# Altium PCB EPS.PcbDoc
Units mm, origin at the board's own origin, x right, y up, seen from the top; angles counter-clockwise.
Board outline 80 x 80 mm, 4 copper layers (Top Layer, Int1 (GND), Int2 (PWR), Bottom Layer), stack 1.57 mm thick; 34 components, 14 nets, 95 pads, 23 vias.
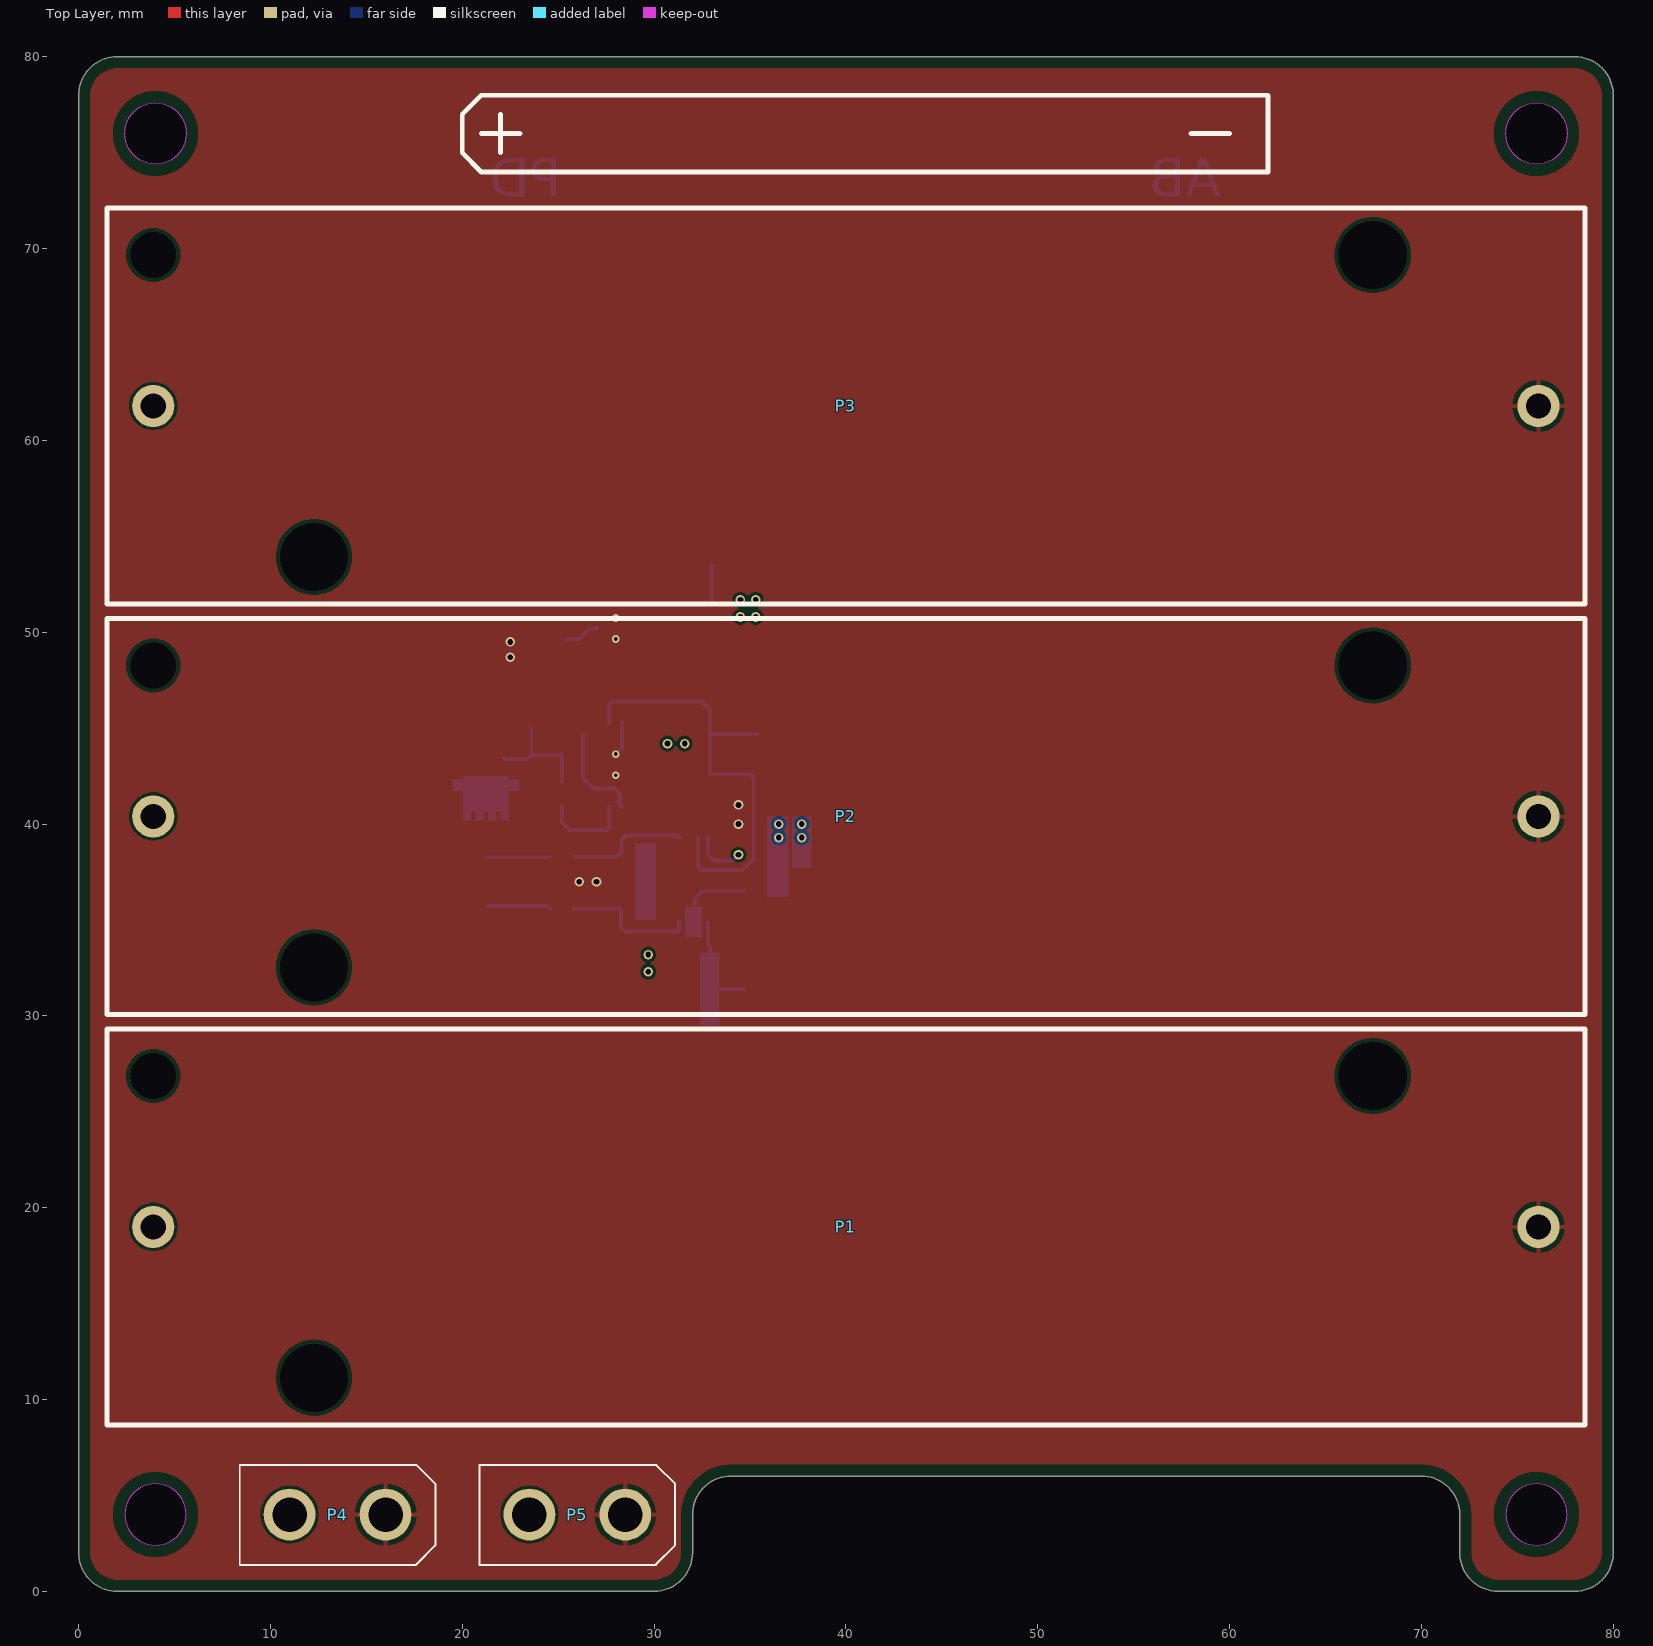
[diagram p0: Top Layer view]
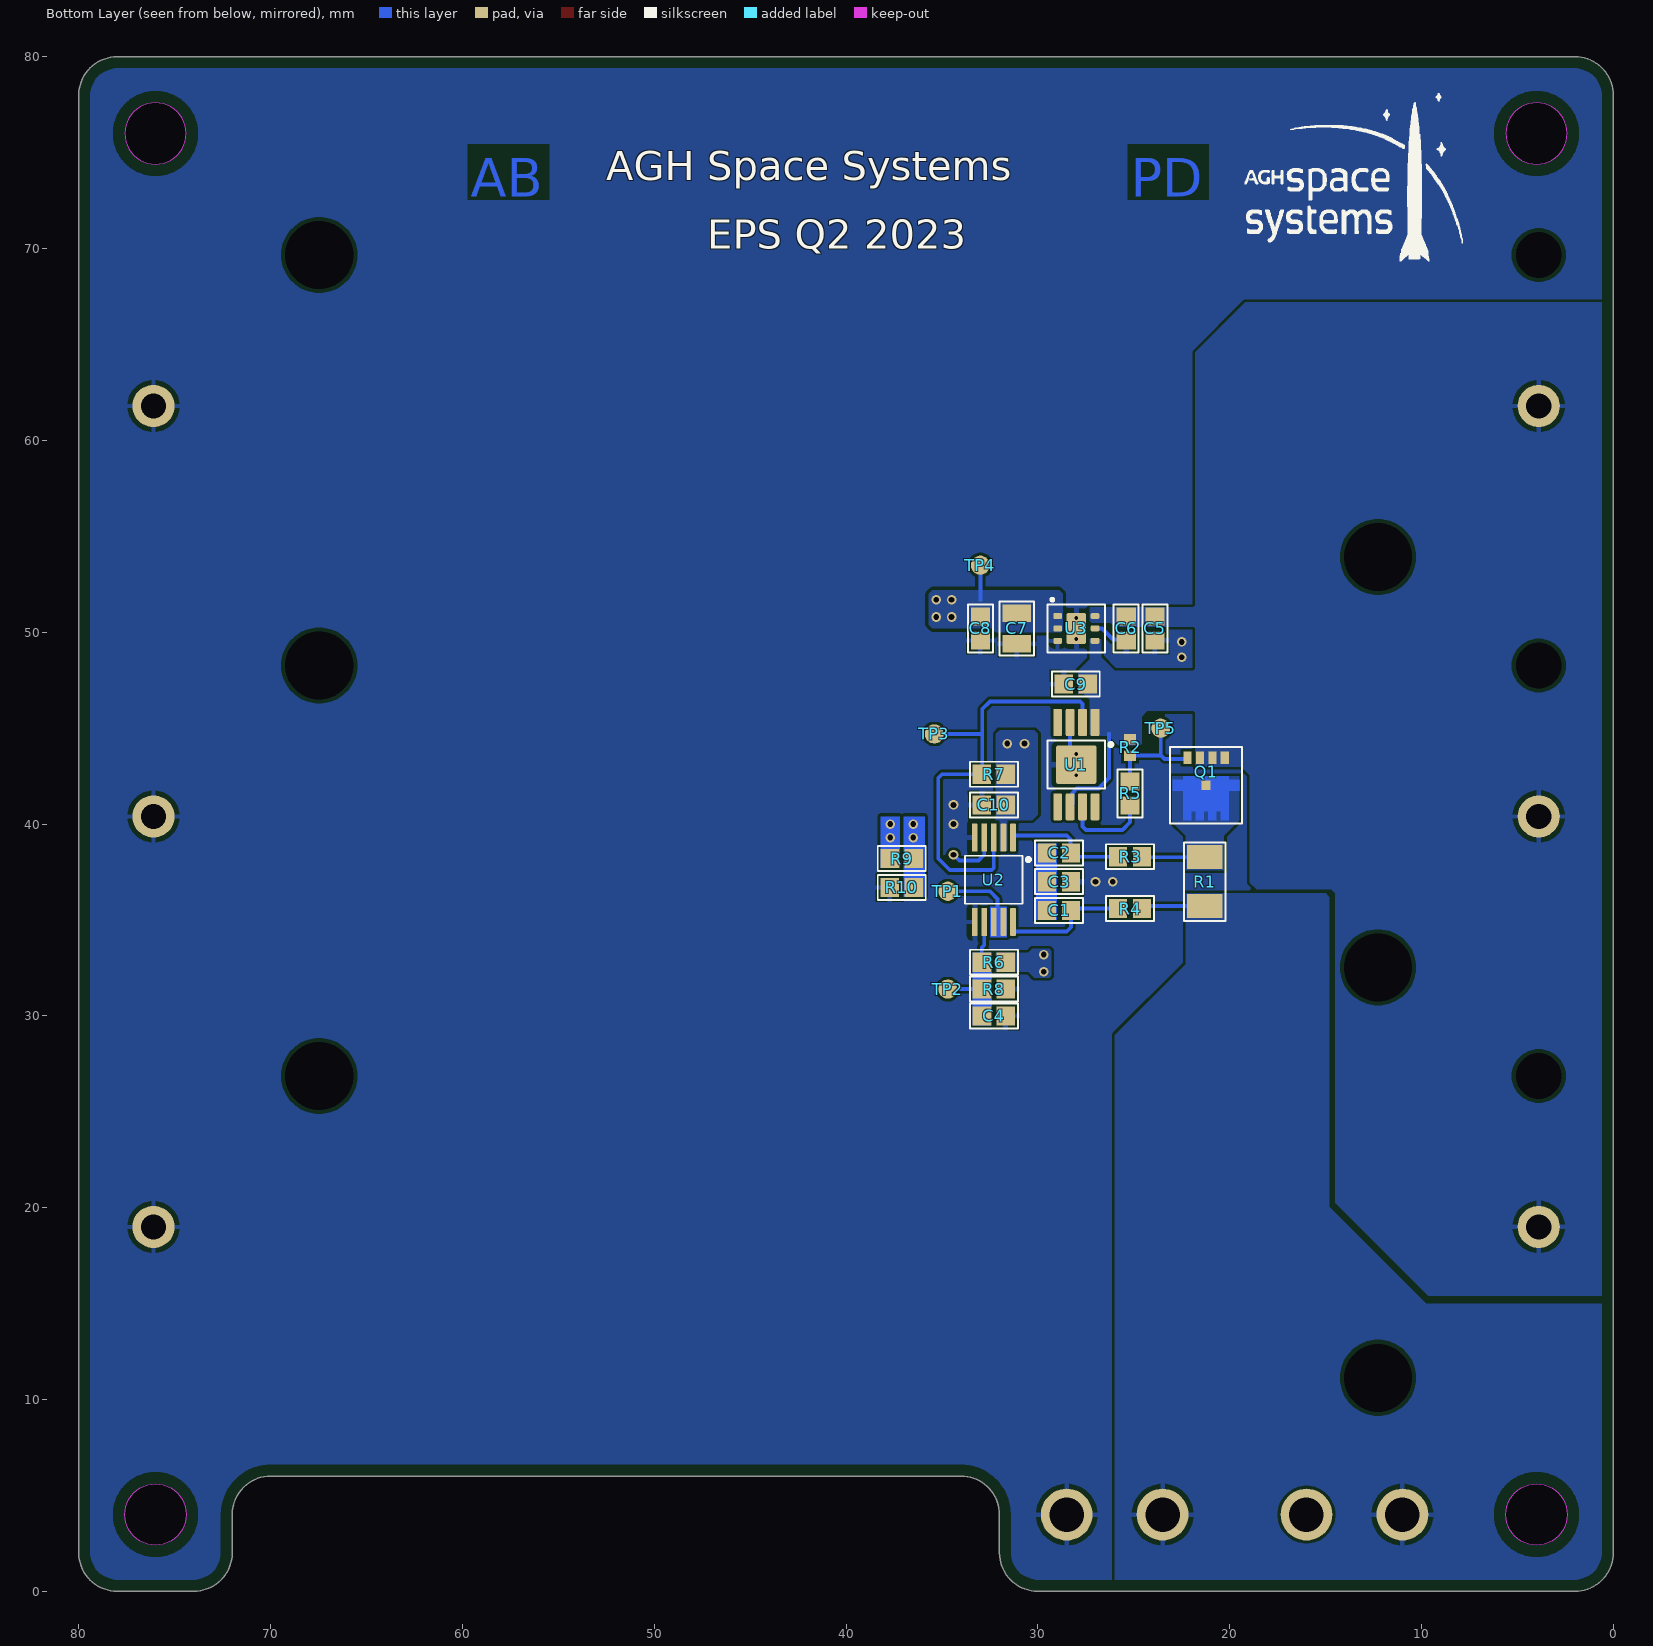
[diagram p1: Bottom Layer view, seen from below]
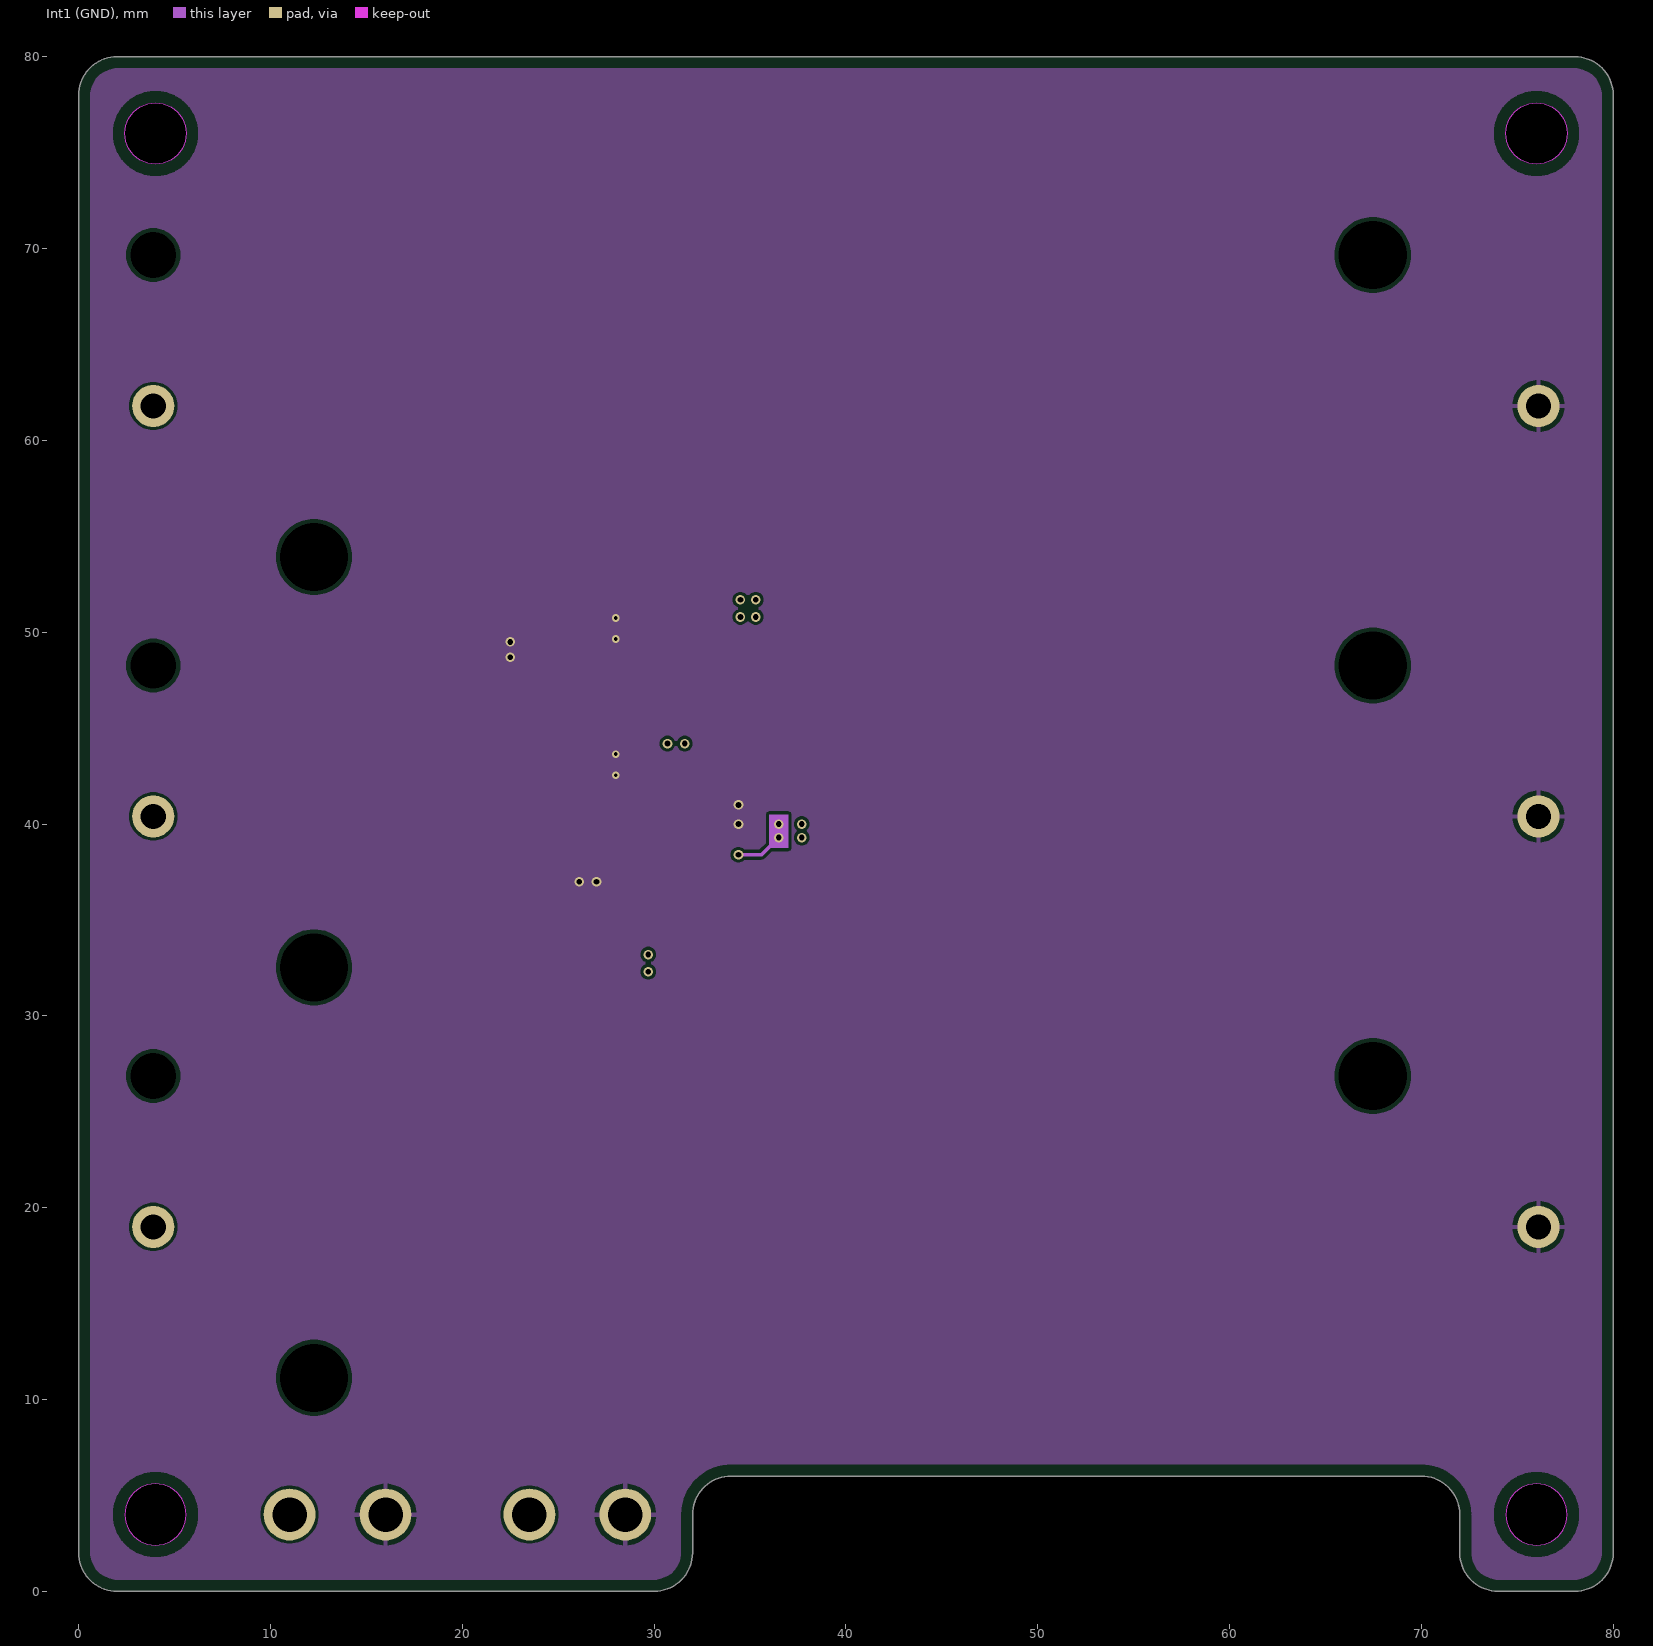
[diagram p2: Int1 (GND)]
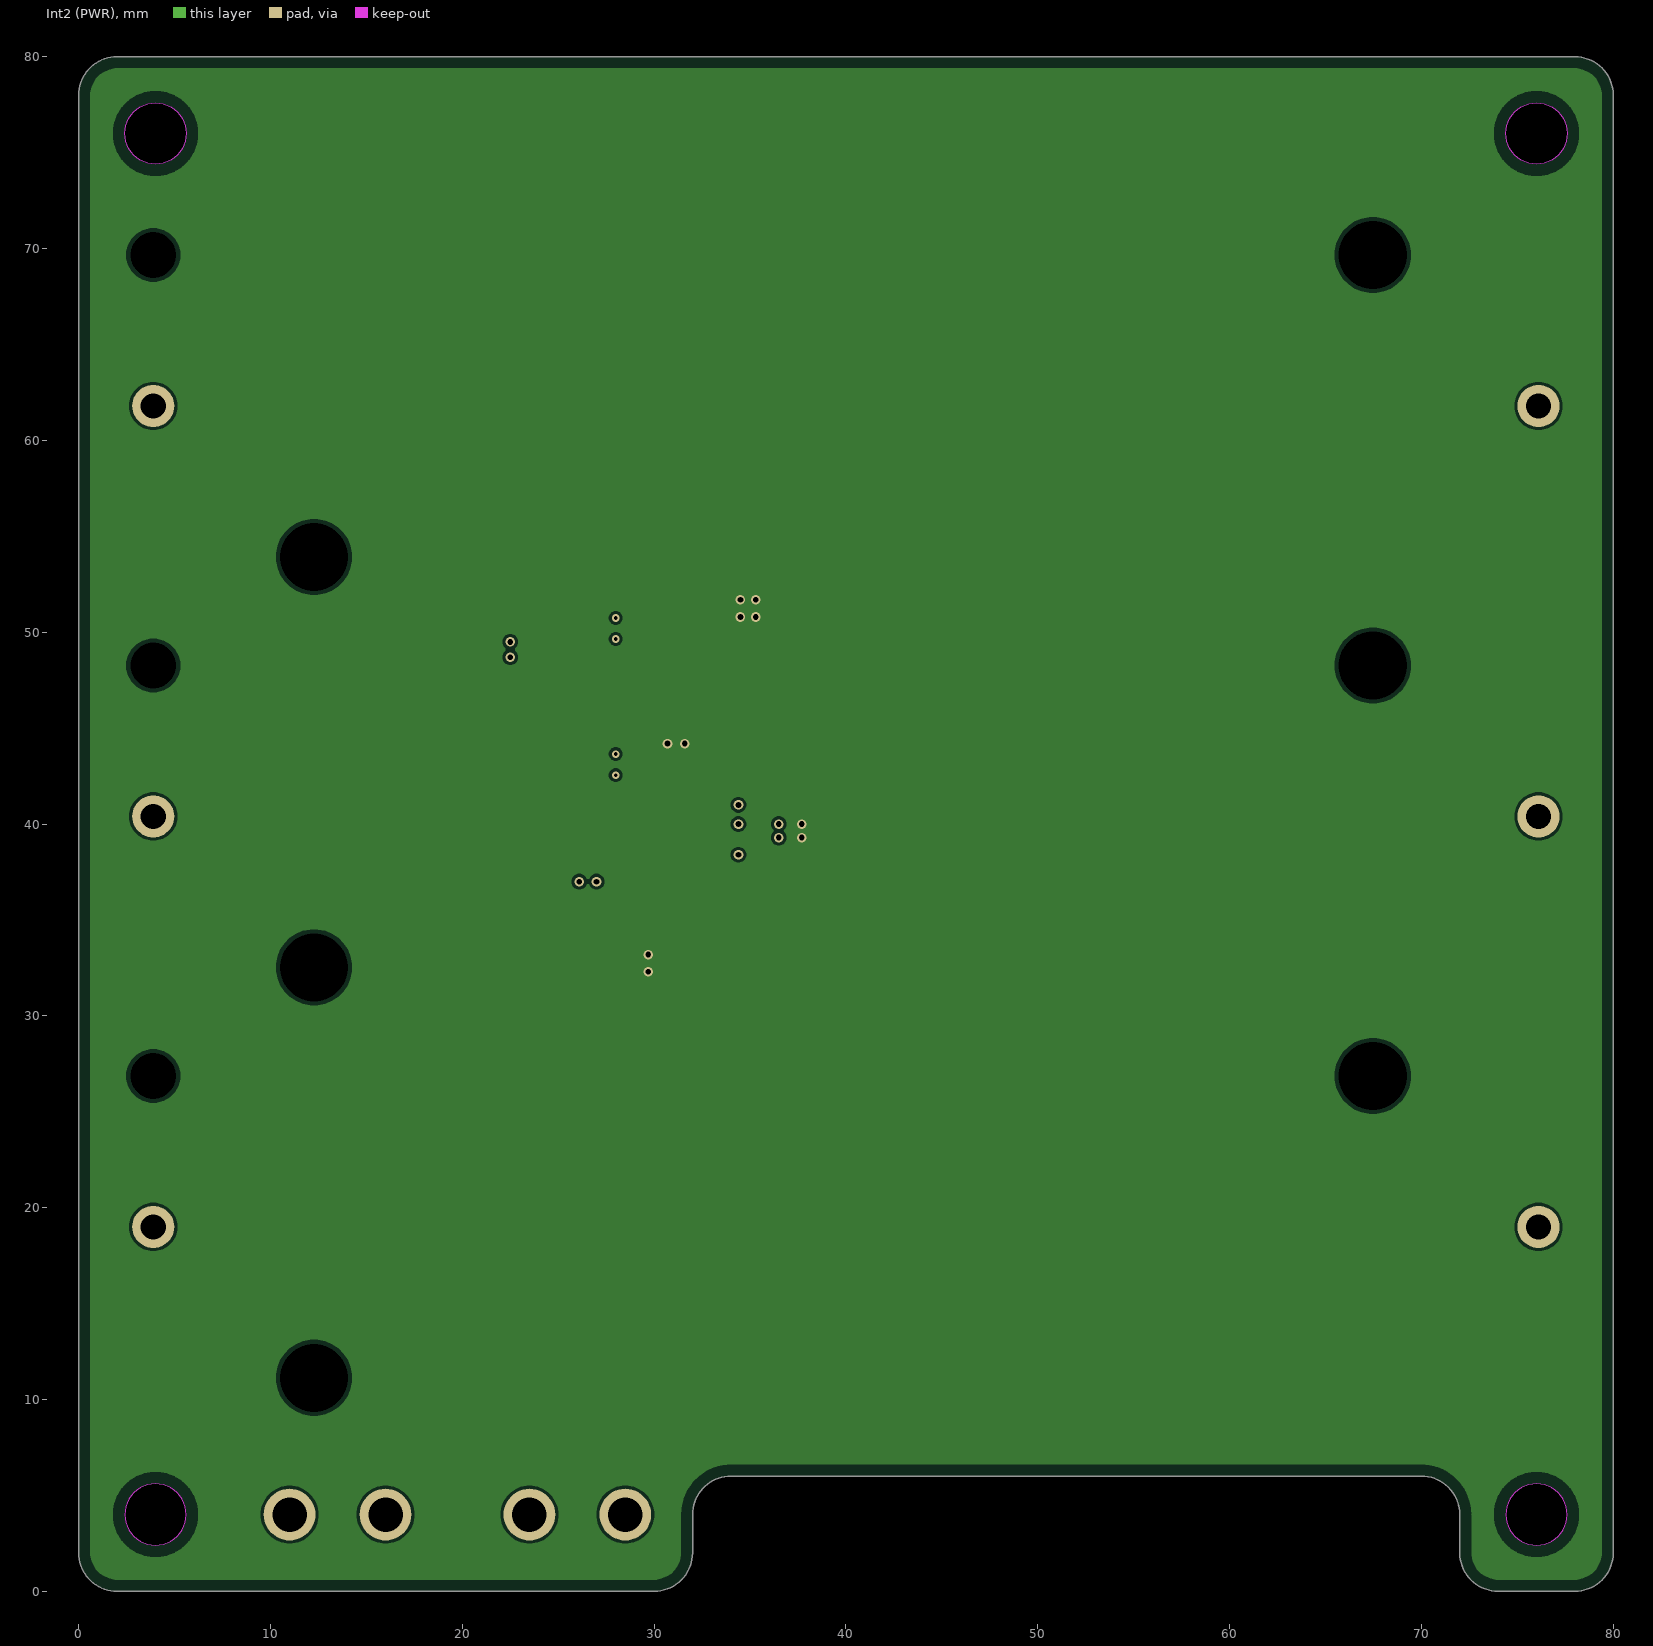
[diagram p3: Int2 (PWR)]
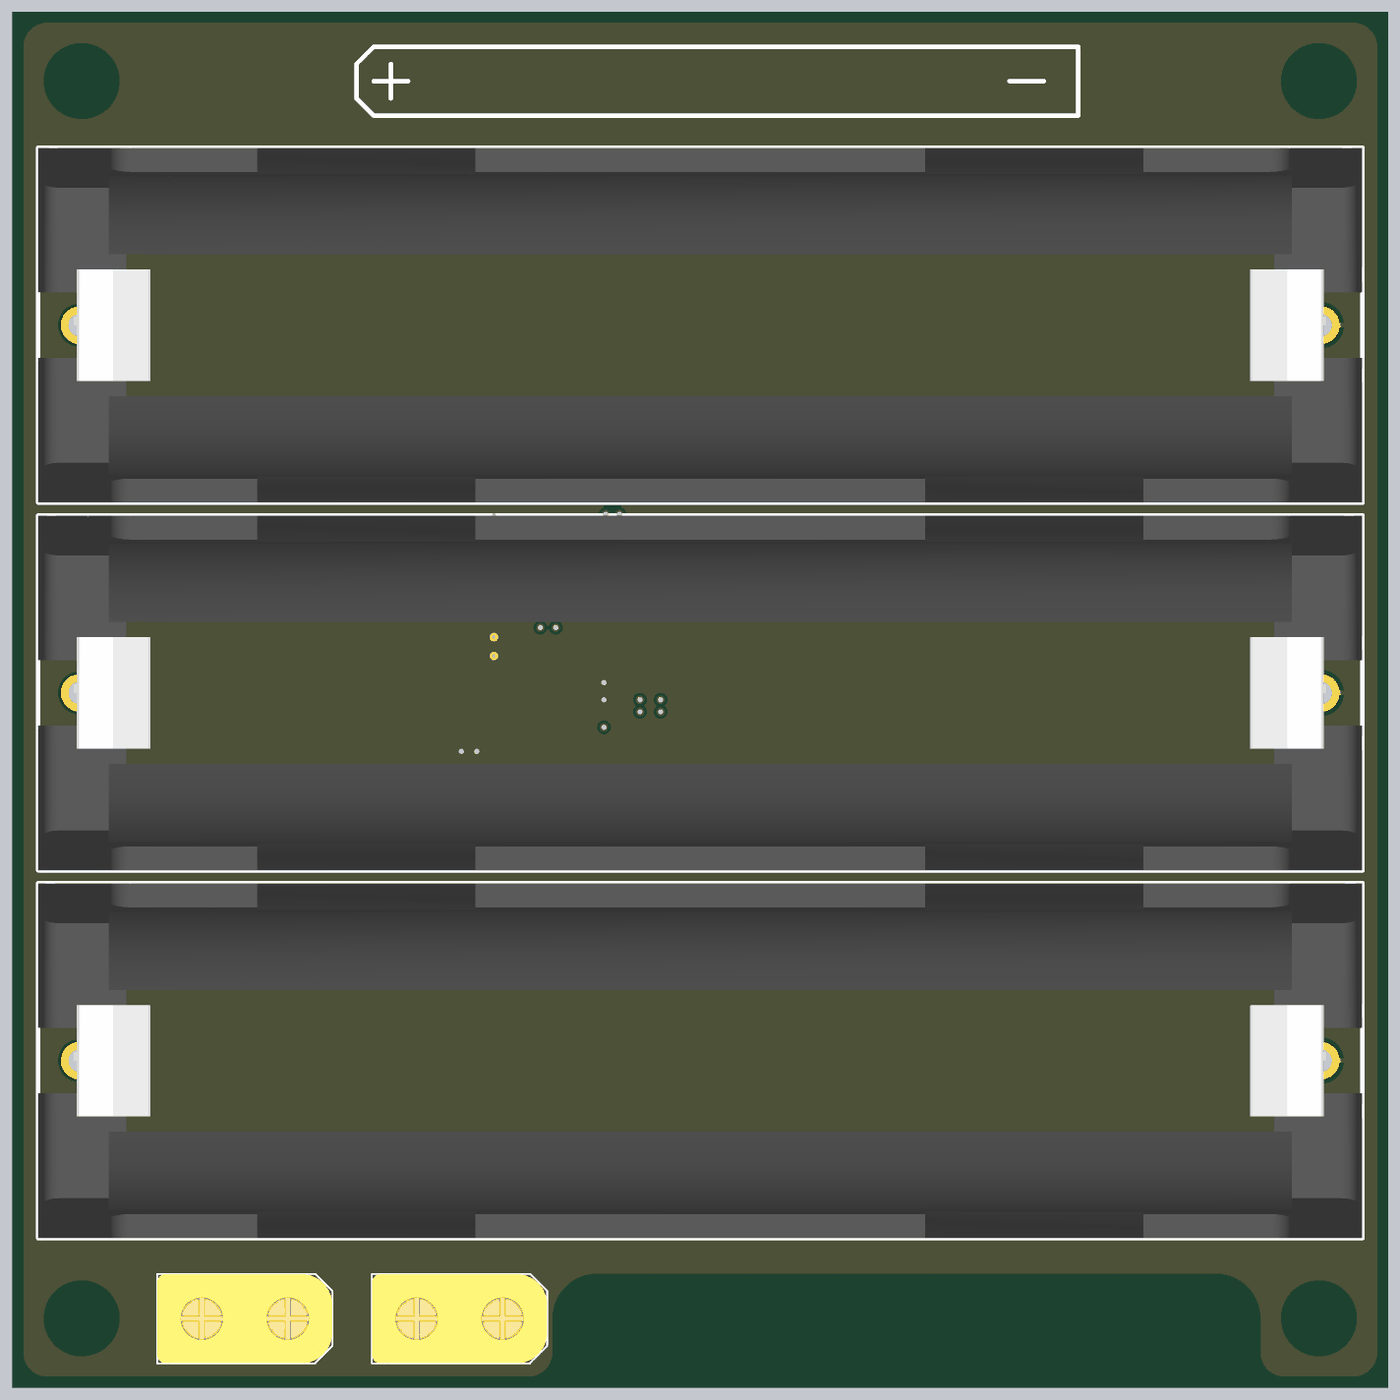
[diagram p4: 3D render of the assembled board from above, using the file's embedded part models]
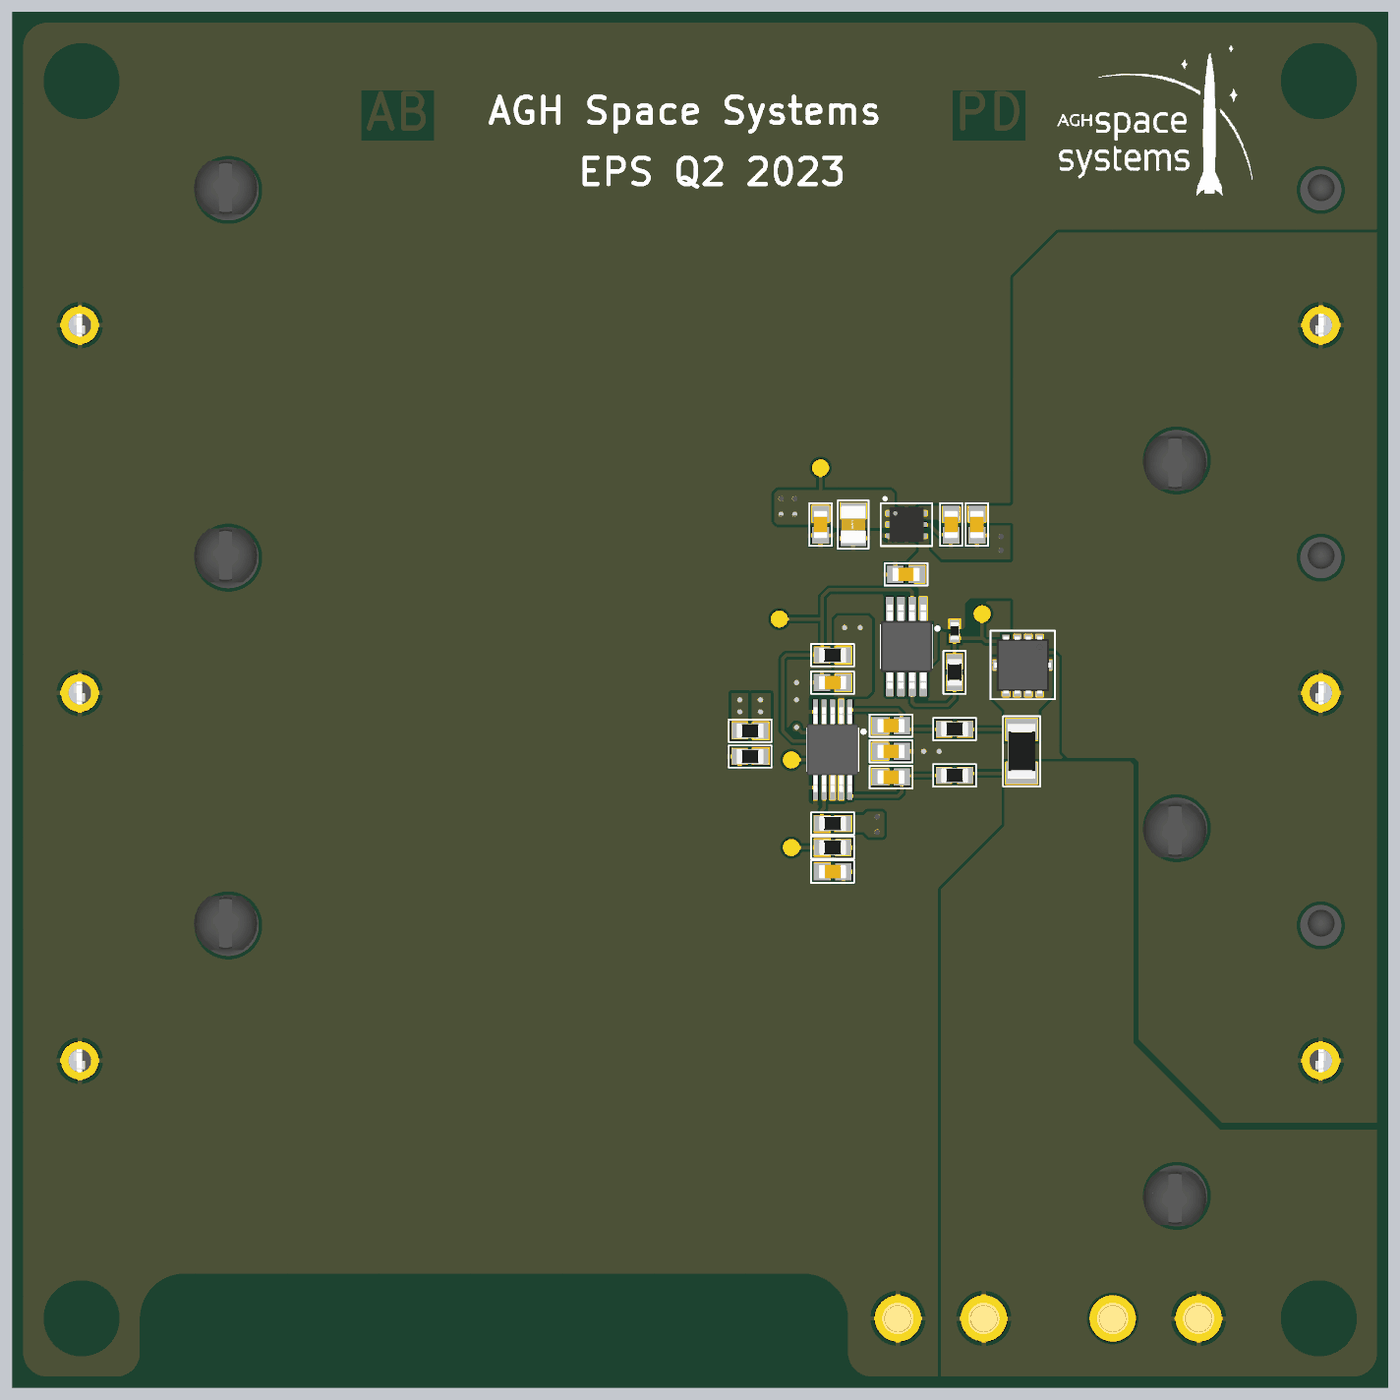
[diagram p5: 3D render of the assembled board from below, using the file's embedded part models]

## Layer stack, top to bottom
Top Solder: solder mask 0.0254, SM-001, Dk 4
Top Layer: signal copper 0.035
Dielectric 2: prepreg 0.2, PP-017, Dk 4.6
Int1 (GND): signal copper 0.0175
Dielectric 3: core 1.065, Core-039, Dk 4.8
Int2 (PWR): signal copper 0.0175
Dielectric 4: prepreg 0.2, PP-017, Dk 4.6
Bottom Layer: signal copper 0.035
Bottom Solder: solder mask 0.0254, SM-001, Dk 4

## Board outline
0.006,2.006 ccw(c2.006,2.006) 2.006,0.006 30,0.006 30.006,0.006 ccw(c30.006,2.006) 32.006,2.006 32.006,4.006 cw(c34.006,4.006) 34.006,6.006 34,6.006 70.006,6.006 cw(c70.006,4.006) 72.006,4.006 72.006,2.006 ccw(c74.006,2.006) 74.006,0.006 78.006,0.006 ccw(c78.006,2.006) 80.006,2.006 80.006,78.006 ccw(c78.006,78.006) 78.006,80.006 2.006,80.006 ccw(c2.006,78.006) 0.006,78.006
cut-out: 76.006,74.406 cw(c76.006,76.006) 74.406,76.006 cw(c76.006,76.006) 76.006,77.606 cw(c76.006,76.006) 77.606,76.006 cw(c76.006,76.006)
cut-out: 4.006,74.406 cw(c4.006,76.006) 2.406,76.006 cw(c4.006,76.006) 4.006,77.606 cw(c4.006,76.006) 5.606,76.006 cw(c4.006,76.006)
cut-out: 2.406,4.006 ccw(c4.006,4.006) 4.006,2.406 ccw(c4.006,4.006) 5.606,4.006 ccw(c4.006,4.006) 4.006,5.606 ccw(c4.006,4.006)
cut-out: 74.406,4.006 ccw(c76.006,4.006) 76.006,2.406 ccw(c76.006,4.006) 77.606,4.006 ccw(c76.006,4.006) 76.006,5.606 ccw(c76.006,4.006)

## Design rules (kind name [scope] priority, off if disabled: settings)
AssemblyTestPointUsage [All] p1 off:
AssemblyTestpoint [All] p1 off: testpointundercomponent=TRUE minsize=1.016 maxsize=2.54 preferedsize=1.524 minholesize=0 maxholesize=1.016 preferedholesize=0.813 testpointgrid=0.025 usegrid=TRUE gridtolerance=0 allowsidetop=TRUE allowsidebottom=TRUE
BoardOutlineClearance BoardOutlineClearance_silk [OnLayer('Top Overlay') or OnLayer('Bottom Overlay')] p1: gap=0 ignorepadtopadclearanceinfootprint=FALSE
BoardOutlineClearance [All] p2: gap=0.6 ignorepadtopadclearanceinfootprint=FALSE
Clearance Clearance_HDI_BGA [TouchesRoom('BGA')] p1: gap=0.1 ignorepadtopadclearanceinfootprint=TRUE
Clearance Clearance_HDI [InNetClass('HDI') vs InNetClass('HDI')] p2: gap=0.15 ignorepadtopadclearanceinfootprint=TRUE except(0.2: Arc-Hole Track-Hole SMDPad-Hole THPad-Hole Via-Hole Fill-Hole Poly-Hole Region-Hole Text-Hole)
Clearance Clearance_HV [InNetClass('HV')] p3: gap=0.4 ignorepadtopadclearanceinfootprint=FALSE
Clearance Clearance_Internal [not (OnLayer('Top Shield') or OnLayer('Bottom Shield'))] p4: gap=0.15 ignorepadtopadclearanceinfootprint=TRUE except(0.2: Arc-Hole Track-Hole SMDPad-Hole THPad-Hole Via-Hole Fill-Hole Poly-Hole Region-Hole Text-Hole)
Clearance [All] p5: gap=0.25 ignorepadtopadclearanceinfootprint=TRUE
ComponentClearance [(CompPinCount > 1) vs (CompPinCount > 1)] p1: gap=0.5 collisioncheckmode=3 verticalgap=0.5 showdistances=FALSE
ComponentOrientations [All] p1: allowedrotations=27
FabricationTestPointUsage [All] p1 off: valid=0 allowmultiple=FALSE
FabricationTestpoint [All] p1 off: side=3 testpointundercomponent=TRUE minsize=1.016 maxsize=2.54 preferedsize=1.524 minholesize=0 maxholesize=1.016 preferedholesize=0.813 testpointgrid=0.025 allowsidetop=TRUE allowsidebottom=TRUE usegrid=TRUE gridtolerance=0
Height [All] p1: minheight=0 maxheight=50 prefheight=10
HoleSize [All] p1: absolutevalues=TRUE maxlimit=5.2 minlimit=0.2 maxpercent=80.000 minpercent=20.000
HoleToHoleClearance [All] p1: gap=0.3 allowstackedmicrovias=FALSE
MinimumAnnularRing MinimumAnnularRing_PTH [IsThruPin] p1: minimumring=0.1
MinimumAnnularRing MinimumAnnularRing_HDI [InNetClass('HDI') or TouchesRoom('BGA')] p2: minimumring=0.1
MinimumAnnularRing [All] p3: minimumring=0.1
MinimumSolderMaskSliver [All] p1: minsoldermaskwidth=0.09
PlaneClearance [All] p1: clearance=0.5
PlaneConnect [All] p1: pad.planeconnectstyle=Relief pad.reliefexpansion=0.5 pad.reliefentries=4 pad.reliefconductorwidth=0.25 pad.reliefairgap=0.25 via.planeconnectstyle=Direct via.reliefexpansion=0.508 via.reliefentries=4 via.reliefconductorwidth=0.254 via.reliefairgap=0.254
PolygonConnect PolygonConnect_GND [InNet('GND')] p1: thpad.connectstyle=Relief thpad.reliefconductorwidth=0.25 thpad.reliefentries=4 thpad.polygonreliefangle="90 Angle" thpad.airgapwidth=0.25 smdpad.connectstyle=Relief smdpad.reliefconductorwidth=0.25 smdpad.reliefentries=4 smdpad.polygonreliefangle="90 Angle" smdpad.airgapwidth=0.25 via.connectstyle=Direct via.reliefconductorwidth=0.254 via.reliefentries=4 via.polygonreliefangle="90 Angle" via.airgapwidth=0.254
PolygonConnect PolygonConnect_1 [All] p2: thpad.connectstyle=Relief thpad.reliefconductorwidth=0.254 thpad.reliefentries=4 thpad.polygonreliefangle="90 Angle" thpad.airgapwidth=0.254 smdpad.connectstyle=Direct smdpad.reliefconductorwidth=0.254 smdpad.reliefentries=4 smdpad.polygonreliefangle="90 Angle" smdpad.airgapwidth=0.254 via.connectstyle=Direct via.reliefconductorwidth=0.254 via.reliefentries=4 via.polygonreliefangle="90 Angle" via.airgapwidth=0.254
RoomDefinition EPS [InComponentClass('EPS')] p1: confinementstyle=ConfineOut formatcopy=TRUE lockcomponents=FALSE outline 99.45,58 112.25,58 112.25,70.1 99.45,70.1
RoutingVias [All] p1: holewidth=0.4 width=0.8 viastyle="Through Hole" minholewidth=0.2 minwidth=0.4 maxholewidth=0.5 maxwidth=1
SilkToSilkClearance [All] p1: silktosilkclearance=0
SilkToSolderMaskClearance [IsPad] p1: minsilkscreentomaskgap=0.1 clearancetoexposedcopper=TRUE
SolderMaskExpansion [All] p1: expansion=0.05 istentingtop=FALSE
UnRoutedNet [All] p1: checkbadconnections=TRUE
Width Width_FinePitch_BGA [(InNetClass('FinePitch') or InNetClass('HDI')) and  TouchesRoom('BGA')] p1: maxlimit=2 minlimit=0.1 preferedwidth=0.1
Width Width_FinePitch [InNetClass('FinePitch') or InNetClass('HDI')] p2: maxlimit=2 minlimit=0.15 preferedwidth=0.15
Width [All] p3: maxlimit=2 minlimit=0.2 preferedwidth=0.2
16 further rules are at their usual default settings.

## Components (designator, comment, footprint, x,y, rotation, side; value= is the part's Value field where it differs from the comment)
C1 "C" C_0603 28.9,35.5 r180 bottom value=100nF
C2 "C" C_0603 28.9,38.5 r0 bottom value=100nF
C3 "C" C_0603 28.9,37 r180 bottom value=10nF
C4 "C" C_0603 32.3,30 r180 bottom value=100nF
C5 "C" C_0603 23.9,50.2 r270 bottom value=1uF
C6 "C" C_0603 25.4,50.2 r270 bottom value=100nF
C7 "C" C_0805 31.1,50.2 r270 bottom value=2.2uF
C8 "C" C_0603 33,50.2 r270 bottom value=100nF
C9 "C" C_0603 28.025,47.3 r0 bottom value=100nF
C10 "C" C_0603 32.3,41 r0 bottom value=100nF
P1 "P_BATT" B_1043 40,19 r180 top locked value=1043
P2 "P_BATT" B_1043 40,40.4 r180 top locked value=1043
P3 "P_BATT" B_1043 40,61.8 r180 top locked value=1043
P4 "P_Header_2" XT30 13.5,4 r90 top value=XT30
P5 "P_Header_2" XT30 26,4 r90 top value=XT30
Q1 "Q_PMOSFET" WDFN_8 21.235,42.025 r180 bottom value=PXP6R1-30QLJ
R1 "R" R_1206 21.3,37 r270 bottom value=1mR
R2 "R" R_0402 25.2,44 r270 bottom value=47k
R3 "R" R_0603 25.2,38.3 r0 bottom value=10R
R4 "R" R_0603 25.2,35.6 r0 bottom value=10R
R5 "R" R_0603 25.2,41.6 r90 bottom value=10R
R6 "R" R_0603 32.3,32.8 r0 bottom value=5k
R7 "R" R_0603 32.3,42.6 r0 bottom value=10k
R8 "R" R_0603 32.3,31.4 r180 bottom value=10k
R9 "R" R_0603 37.1,38.2 r180 bottom value=10k
R10 "R" R_0603 37.1,36.7 r0 bottom value=0R
TP1 "TP_TestPoint" TP_01#1 34.7,36.8 r90 bottom value=TP
TP2 "TP_TestPoint" TP_01#2 34.7,31.4 r90 bottom value=TP
TP3 "TP_TestPoint" TP_01#2 35.4,44.7 r90 bottom value=TP
TP4 "TP_TestPoint" TP_01#2 33,53.5 r90 bottom value=TP
TP5 "TP_TestPoint" TP_01#2 23.6,45 r90 bottom value=TP
U1 "IC_UCC27423_Q1" MSOP_8 28,43.1 r0 bottom value=UCC27423QDGNRQ1
U2 "IC_INA381_Q1" VSSOP_10 32.3,37.1 r0 bottom value=INA381A3QDGSRQ1
U3 "IC_TLV76733DRVR" WSON_6 28,50.2 r180 bottom value=TLV76733DRVR

## Footprints (in the part's own frame and the unit in brackets; to place one, negate y for a bottom-side part, rotate by r counter-clockwise, add the part's x,y. Pads: shape width x height; smd on the part's side, far side on the other; paste and mask are expansions set on the pad)
B_1043 [mm]
  round 2.2 hole 1.32: 1(36.11,0) 2(-36.11,0)
  round 0 hole 3.55 unplated mask+0.102: ""(-27.47,-7.87)
  round 0 hole 3.55 unplated: ""(27.73,7.87)
  round 0 hole 2.39 unplated mask+0.102: ""(36.11,-7.87)
  silkscreen extent -38.54,-10.33 38.52,10.33, body extent -38.53,-10.32 38.53,10.33, height 15.16
C_0603 [mm]
  rect 0.95x1 smd: 1(-0.625,0) 2(0.625,0)
  silkscreen extent -1.25,-0.65 1.25,0.65, body extent -0.8,-0.4 0.8,0.4, height 0.8
C_0805 [mm]
  rect 0.9x1.5 smd: 1(-0.8,0) 2(0.8,0)
  silkscreen extent -1.4,-0.9 1.4,0.9, body extent -1.1,-0.73 1.1,0.72, height 0.88
MSOP_8 [mm]
  rrect22% 0.45x1.4 smd mask+0.05: 1(-0.975,-2.2) 2(-0.325,-2.2) 3(0.325,-2.2) 4(0.975,-2.2) 5(0.975,2.2) 6(0.325,2.2) 7(-0.325,2.2) 8(-0.975,2.2)
  rrect10% 2.1x2 smd paste-0.05 mask-0.05: 9(0,0)
  silkscreen extent -1.86,-1.25 1.5,1.25, body extent -1.5,-2.45 1.5,2.45, height 1.1
R_0402 [mm]
  rect 0.55x0.65 smd paste-0.04: 1(-0.425,0) 2(0.425,0)
  body extent -0.5,-0.25 0.5,0.25, height 0.35
R_0603 [mm]
  rect 0.95x1 smd paste-0.038: 1(-0.625,0) 2(0.625,0)
  silkscreen extent -1.25,-0.65 1.25,0.65, body extent -0.77,-0.42 0.78,0.43, height 0.46
R_1206 [mm]
  rect 1.25x1.85 smd: 1(-1.275,0) 2(1.275,0)
  silkscreen extent -2.05,-1.07 2.05,1.07, body extent -1.6,-0.8 1.6,0.8, height 0.56
TP_01#1 [mm]
  round 1 smd paste-0.6: 1(-0.3,0)
TP_01#2 [mm]
  round 1 smd paste-0.6: 1(0,0)
VSSOP_10 [mm]
  rrect22% 0.3x1.45 smd mask+0.05: 1(-1,-2.2) 2(-0.5,-2.2) 3(0,-2.2) 4(0.5,-2.2) 5(1,-2.2) 6(1,2.2) 7(0.5,2.2) 8(0,2.2) 9(-0.5,2.2) 10(-1,2.2)
  silkscreen extent -1.86,-1.25 1.5,1.25, body extent -1.5,-2.46 1.5,2.46, height 1.09
WDFN_8 [mm]
  rect 0.42x0.66 smd: 1(-0.975,1.435) 2(-0.325,1.435) 2(0.325,1.435) 2(0.975,1.435)
  rect 0.48x0.48 smd: 3(0,0)
  Top Layer region: -1.185,-1.835 -0.765,-1.835 -0.765,-1.365 -0.535,-1.365 -0.535,-1.835 -0.115,-1.835 -0.115,-1.365 0.115,-1.365 0.115,-1.835 0.535,-1.835 0.535,-1.365 0.765,-1.365 0.765,-1.835 1.185,-1.835 1.185,-0.285 1.73,-0.285 1.73,0.285 1.185,0.285 1.185,0.465 -1.185,0.465 -1.185,0.285 -1.73,0.285 -1.73,-0.285 -1.185,-0.285
  silkscreen extent -1.88,-2 1.88,2, body extent -1.65,-1.65 1.65,1.65, height 0.72
WSON_6 [mm]
  rrect40% 0.45x0.3 smd: 1(-0.975,0.65) 2(-0.975,0) 3(-0.975,-0.65) 4(0.975,-0.65) 5(0.975,0) 6(0.975,0.65)
  rrect12% 1x1.6 smd: 7(0,0)
  silkscreen extent -1.5,-1.25 1.5,1.55, body extent -1.01,-1 1.01,1, height 0.8
XT30 [mm]
  round 2.7 hole 1.8: 1(0,2.5) 2(0,-2.5)
  silkscreen extent -2.62,-5.1 2.58,5.1, body extent -2.62,-5.1 2.58,5.1, height 9.4

## Part data
C1 C2 C4 C6 C8 C9 C10: library part C_100nF_50V_0603, "Capacitor", Dielectric=X7R, Manufacturer=Kemet, Manufacturer Part Number=C0603T104K5RCL7136, Supplier Part Number 1=399-6305-1-ND, Tolerance=10%, Voltage=50V, Fail Rate=A, Grade=2, HelpURL=https://content.kemet.com/datasheets/KEM_C1027_X7R_COTS_SMD.pdf, Part Number=C_100nF_50V_0603, Status=Active, Supplier 1=Digi-Key, Tmax=125, Tmin=-55
C3: library part C_10nF_50V_0603, "Capacitor", Dielectric=C0G, Manufacturer=Kemet, Manufacturer Part Number=C0603T103J5RAC7867, Supplier Part Number 1=399-20387-1-ND, Tolerance=5%, Voltage=50V, Fail Rate=A, Grade=2, HelpURL=https://content.kemet.com/datasheets/KEM_C1027_X7R_COTS_SMD.pdf, Part Number=C_10nF_50V_0603, Status=Active, Supplier 1=Digi-Key, Tmax=125, Tmin=-55
C5: library part C_1uF_25V_0603, "Capacitor", Dielectric=X7R, Manufacturer=Murata, Manufacturer Part Number="C0603T222K5RAC7867 / GCJ188R71E105KA01D", Supplier Part Number 1=81-GCJ188R71E105KA1D, Tolerance=10%, Voltage=25V, Fail Rate=A, Grade=2, HelpURL=https://www.murata.com/en-eu/api/pdfdownloadapi?cate=luCeramicCapacitorsSMD&partno=GCJ188R71E105KA01%23, Part Number=C_1uF_25V_0603, Status=Active, Supplier 1=Mouser, Tmax=125, Tmin=-55
C7: library part C_2.2uF_16V_0805, "Capacitor", Dielectric=X7R, Manufacturer=Kemet, Manufacturer Part Number=C0805T225K4RAL7800, Supplier Part Number 1=399-17975-6-ND, Tolerance=10%, Voltage=16V, Fail Rate=A, Grade=2, HelpURL=https://content.kemet.com/datasheets/KEM_C1027_X7R_COTS_SMD.pdf, Part Number=C_2.2uF_16V_0805, Status=Active, Supplier 1=Digi-Key, Tmax=125, Tmin=-55
P1 P2 P3: library part 18650_Holder_1043, "1043", Manufacturer="Keystone Electronics", Supplier Part Number 1=534-1043, Grade=3, HelpURL=https://www.keyelco.com/userAssets/file/M65p27.pdf, Manufacturer Part Number=1043, Part Number=18650_Holder_1043, Status=Active, Supplier 1=Mouser
P4 P5: library part XT30, "XT30", Manufacturer=DFRobot, Manufacturer Part Number=FIT0586, Supplier Part Number 1=1738-1436-ND, Desc=XT30, Grade=3, HelpURL=https://media.digikey.com/pdf/Data%20Sheets/DFRobot%20PDFs/FIT0586_Web.pdf, Part Number=XT30, Status=Active, Supplier 1=DigiKey
Q1: library part PXP6R1-30QLJ, "Low Vgs Single P-Channel", Manufacturer=NEXPERIA, Max Power Dissipation=50W, Supplier Part Number 1=771-PXP6R1-30QLJ, Grade=2, HelpURL=https://assets.nexperia.com/documents/data-sheet/PXP6R1-30QL.pdf, Manufacturer Part Number=PXP6R1-30QLJ, Part Number=PXP6R1-30QLJ, Status=Active, Supplier 1=Mouser, Tmax=150, Tmin=-55
R1: library part R_1mR_NA_1206, Manufacturer="TT Electronics", Manufacturer Part Number="ULRG1-1206-R001-F-LF-SLT / ULRG1-1206-R001-F-LF-SLT", RMS Power=1W, Supplier Part Number 1=66-ULRG1-1206-R001F, Tolerance=1%, Voltage=NA, Grade=2, HelpURL=https://www.ttelectronics.com/TTElectronics/media/ProductFiles/Datasheets/ULR.pdf, Part Number=R_1mR_NA_1206, Status=Active, Supplier 1=Mouser, TCR=50ppm, Tmax=170, Tmin=-55
R2: library part R_47k_50V_0402, Manufacturer=Vishay, Manufacturer Part Number=MCS0402MD4702BE100, RMS Power=0.1W, Supplier Part Number 1=MCS0402-47.0K-MBCT-ND, Tolerance=0.1%, Voltage=50V, Grade=2, HelpURL=https://www.vishay.com/docs/28785/mcat_pre.pdf, Part Number=R_47k_50V_0402, Status=Active, Supplier 1=Digi-Key, Supplier 2=Mouser, Supplier Part Number 2=594-MCS0402MD4702BE1, TCR=25ppm, Tmax=155, Tmin=-55
R3 R4 R5: library part R_10R_75V_0603, Manufacturer=Vishay, Manufacturer Part Number=MCT0603PD1009DP500, RMS Power=0.25W, Supplier Part Number 1=749-1520-1-ND, Tolerance=0.5%, Voltage=75V, Grade=2, HelpURL=https://www.vishay.com/docs/28916/mcxhp.pdf, Part Number=R_10R_75V_0603, Status=Active, Supplier 1=Digi-Key, Supplier 2=Mouser, Supplier Part Number 2=594-MCT0603PD1009DP5, TCR=25ppm, Tmax=175, Tmin=-55
R6: library part R_5k_75V_0603, Manufacturer=YAGEO, Manufacturer Part Number=RT0603BRE075KL, RMS Power=0.1W, Supplier Part Number 1=603-RT0603BRE075KL, Tolerance=0.1%, Voltage=75V, Grade=2, HelpURL=https://www.yageo.com/upload/media/product/productsearch/datasheet/rchip/PYu-RT_1-to-0.01_RoHS_L_13.pdf, Part Number=R_5k_75V_0603, Status=Active, Supplier 1=Mouser, TCR=50ppm, Tmax=155, Tmin=-55
R7 R8 R9: library part R_10k_75V_0603, Manufacturer=Vishay, Manufacturer Part Number=MCT0603PD1002DP500, RMS Power=0.25W, Supplier Part Number 1=749-1528-1-ND, Tolerance=0.5%, Voltage=75V, Grade=2, HelpURL=https://www.vishay.com/docs/28916/mcxhp.pdf, Part Number=R_10k_75V_0603, Status=Active, Supplier 1=Digi-Key, Supplier 2=Mouser, Supplier Part Number 2=594-MCT0603PD1002DP5, TCR=25ppm, Tmax=175, Tmin=-55
R10: library part R_0R_75V_0603, Current=1A, Manufacturer=Vishay, Manufacturer Part Number=MCT0603MZ0000ZP500, Supplier Part Number 1=749-1745-1-ND, Tolerance=20mR, Voltage=75V, Grade=2, HelpURL=https://www.vishay.com/docs/28760/mcat_pro.pdf, Part Number=R_0R_75V_0603, Status=Active, Supplier 1=Digi-Key, Supplier 2=Mouser, Supplier Part Number 2=594-MCT0603MZ0000ZP5, Tmax=155, Tmin=-55
TP1 TP2 TP3 TP4 TP5: library part TestPoint1, Manufacturer="Progresja Space", Grade=3, Part Number=TestPoint1, Status=Active
U1: library part UCC27423, "Dual 4-A High-Speed Low-Side MOSFET Drivers With Enable", Manufacturer=TI, Manufacturer Part Number=UCC27423QDGNRQ1, Supplier Part Number 1=595-UCC27423QDGNRQ1, Grade=2, HelpURL=https://www.ti.com/lit/ds/symlink/ucc27423-q1.pdf?HQS=dis-mous-null-mousermode-dsf-pf-null-wwe&ts=1651498832882&ref_url=https%253A%252F%252Fwww.mouser.pl%252F, Part Number=UCC27423, Status=Active, Supplier 1=Mouser, Tmax=125, Tmin=-40
U2: library part INA381A3QDGSRQ1, "Current Sense Amplifier With Integrated Overcurrent Comparator", Manufacturer=TI, Supplier Part Number 1=595-INA381A3QDGSRQ1, Grade=2, HelpURL=https://www.ti.com/lit/ds/symlink/ina381-q1.pdf, Manufacturer Part Number=INA381A3QDGSRQ1, Part Number=INA381A3QDGSRQ1, Status=Active, Supplier 1=Mouser, Tmax=125, Tmin=-40
U3: library part TLV76733DRVR, "3.3V LDO Voltage Regulator", Manufacturer=TI, =Value=TLV76733DRVR, Grade=2, HelpURL=https://www.ti.com/lit/ds/symlink/tlv767.pdf?ts=1677533353578&ref_url=https%253A%252F%252Fwww.ti.com%252Fproduct%252FTLV767%252Fpart-details%252FTLV76733DRVR, Manufacturer Part Number=TLV76733DRVR, Part Number=TLV76733DRVR, Status=Active, Supplier 2=Mouser, Supplier Part Number 2=595-TLV76733DRVR, Tmax=125, Tmin=-40

## Via types
v1: diameter 0.5, hole 0.3, Top Layer to Bottom Layer, tented both sides, 19 vias
v2: diameter 0.4, hole 0.2, Top Layer to Bottom Layer, 4 vias

## Nets (pads, with @x,y where several pads share a name; then routed paths per layer and width w, separated by ;. In a path a pad name is that pad's centre, name@x,y a point inside that pad or via, vN(x,y) a via of type N, cw(c..) or ccw(c..) an arc to the next point about the centre after c; other vN are vias at no path point)
+3V3: C7.1 C8.1 C10.1 R6.1 R7.1 R9.1 TP4.1 U2.2 U3.1 U3.2 | length 1.8
  Bottom Layer w0.2: 33,51.7 TP4.1
  other v1: 29.7,32.3 29.7,33.2 37.7,39.3 37.7,40 30.7,44.2 31.6,44.2 34.5,50.8 35.3,50.8 34.5,51.7 35.3,51.7
Alert: R7.2 TP3.1 U1.2 U2.3 | length 23.7
  Bottom Layer w0.2: U1.2 27.675,46.275 27.8,46.4 32.5,46.4 32.9,46 32.9,44.7 ; U2.3 32.3,37.717 32.417,37.6 34.6,37.6 35.2,38.2 35.2,42.4 35,42.6 R7.2 32.9,42.625 32.9,44.7 ; TP3.1 32.9,44.7
GND: C3.2 C4.2 C5.2 C6.2 C7.2 C8.2 C9.2 C10.2 P1.2 P2.2 P3.2 P4.2 P5.2 R8.2 R10.2 U1.3 U1.9 U2.5 U2.6 U3.3 U3.5 U3.7 | length 3.7
  Bottom Layer w0.2: C6.2 25.445,49.62 26.083,49.62 26.662,50.199 U3.5@27.024,50.199 ; v2(28,43.65) 28.325,43.975 U1.3
  other v1: 26.1,37 27,37 34.4,40 34.4,41 22.5,48.7 22.5,49.5
  other v2: 28,42.55 28,49.65 28,50.75
NetC1_1: C1.1 C2.2 C3.1
NetC1_2: C1.2 R4.2 U2.10 | length 7
  Bottom Layer w0.2: R4.2 28.175,35.6 C1.2 28.275,34.625 28.5,34.4 31.25,34.4 31.3,34.45 U2.10
NetC2_1: C2.1 R3.2 U2.1 | length 6.4
  Bottom Layer w0.2: R3.2 28.075,38.3 28.3,38.525 28.3,39.2 28.5,39.4 31.25,39.4 31.25,39.35 U2.1
NetC4_1: C4.1 R6.2 R8.1 TP2.1 U2.7 | length 3.9
  Bottom Layer w0.2: U2.7 32.8,33.7 32.925,33.575 R6.2 ; R8.1 TP2.1
NetP4_1: P4.1 P5.1 R1.2 R4.1 | length 3.3
  Bottom Layer w0.2: R1.2 24.45,35.725 R4.1
NetQ1_1: Q1.1 R2.2 R5.2 TP5.1 | length 5.9
  Bottom Layer w0.2: Q1.1 22.27,43.4 23.4,43.4 23.575,43.575 ; TP5.1 23.6,43.6 23.575,43.575 ; R5.2 R2.2 23.575,43.575
NetQ1_3: Q1.3 R1.1 R3.1 | length 3.3
  Bottom Layer w0.2: R1.1 24.55,38.275 R3.1
NetR5_1: R5.1 U1.7 | length 4.6
  Bottom Layer w0.2: R5.1 25.2,40.1 25.6,39.7 27.5,39.7 27.675,39.875 U1.7
NetR9_2: R9.2 R10.1 U2.4 | length 5.2
  Int1 (GND) w0.2: v1(34.4,38.4) 35.6,38.4 v1(36.5,39.3)
  Bottom Layer w0.2: U2.4 32.8,38.4 33.1,38.1 34.1,38.1 v1(34.4,38.4)
  other v1: 36.5,40
NetTP1_1: TP1.1 U2.8 U2.9 | length 3.2
  Bottom Layer w0.2: 32.1,35.7 32.1,36.1 32.5,36.5 TP1.1
VBAT: C5.1 C6.1 C9.1 P1.1 P2.1 P3.1 Q1.2 R2.1 U1.1 U1.6 U3.4 U3.6 | length 5.3
  Bottom Layer w0.2: 26.3,44.7 26.3,42.4 26.85,41.85 27.975,41.85 28.2,41.625 28.2,41.025 U1.6
pads on no net: P1. P2. P3. U1.4 U1.5 U1.8

## Polygon pours and split planes (outlines as drawn)
VBAT on Bottom Layer "VBAT_L04_P001" (solid, pour order 1): 9.65,15.4 14.5,20.25 14.5,36.4 14.7,36.6 18.6,36.6 18.95,36.95 18.95,42.55 19.4,43 21.8,43 21.8,45.8 21.9,45.9 24.3,45.9 24.6,45.6 24.6,44.2 24.7,44.1 25.8,44.1 26.3,44.6 27.3,44.6 27.3,46.5 27.6,46.8 27.9,46.8 27.9,48 27.3,48.6 27.3,49.7 26.8,49.7 26.7,49.6 26.7,48.7 26,48 21.9,48 21.8,48.1 21.8,50.2 21.9,50.3 26,50.3 26.2,50.5 27.2,50.5 27.3,50.6 27.3,51.3 21.9,51.3 21.8,51.4 21.8,64.6 19.2,67.2 0,67.2 0,15.4
NetP4_1 on Bottom Layer "NETP4_1_L04_P013" (solid, pour order 13): 22.3,32.7 26,29 26,0 0,0 0,15 9.75,15 14.8,20.05 14.8,36.2 15,36.4 22.3,36.4
+3V3 on Bottom Layer "+3V3_L04_P009" (solid, pour order 9): 30,41.7 30,40.5 30.3,40.2 31.6,40.2 31.6,38.6 32,38.6 32,40.2 32.2,40.2 32.2,44.7 32,44.9 30.2,44.9 30,44.7 30,43.9
GND on Bottom Layer "GND_L04_P014" (solid, pour order 14): 34.8,41.5 35,41.3 35,39.6 34,38.6 33.1,38.6 33.1,40.3 32.9,40.5 32.4,40.5 32.4,41.5
NetQ1_3 on Bottom Layer "NETQ1_3_L04_P011" (solid, pour order 11): 19.5,42.5 19.5,40.2 20.3,39.4 20.3,37.6 22.3,37.6 22.3,39.4 23,40.1 23,42.5
+3V3 on Bottom Layer "+3V3_L04_P010" (solid, pour order 10): 32.2,33.3 30.5,33.3 30.3,33.5 29.4,33.5 29.3,33.4 29.3,32.1 29.4,32 30.2,32 30.5,32.3 32.2,32.3
GND on Bottom Layer "GND_L04_P015" (solid, pour order 15): 0,0 0,80.006 80.006,80.006 80.006,0
+3V3 on Bottom Layer "+3V3_L04_P003" (solid, pour order 3): 35.5,50.2 35.7,50.4 35.7,52 35.5,52.2 28.9,52.2 28.7,52 28.7,50.1 28.8,50 32.2,50 32.4,50.2
GND on Bottom Layer "GND_L04_P002" (solid, pour order 2): 26,50.1 26.1,50 26.1,48.4 25.9,48.2 22.2,48.2 22,48.4 22,50 22.1,50.1
+3V3 on Int2 (PWR) "+3V3_L03_P005" (solid, pour order 5): 0,80.006 80.006,80.006 80.006,0.006 0,0.006
GND on Top Layer "GND_L01_P007" (solid, pour order 7): 0,0 80.006,0 80.006,80.006 0,80.006
GND on Int1 (GND) "GND_L02_P008" (solid, pour order 8): 0,0 0,80.006 80.006,80.006 80.006,0

## Other copper
Int1 (GND):
  rectangle net NetR9_2: 36,38.75 37,40.5
Bottom Layer:
  rectangle net +3V3: 37.2,37.7 38.2,40.4
  rectangle net NetR9_2: 35.9,36.2 37,40.4
  rectangle net NetC1_1: 29,35 30.1,39
  rectangle net NetTP1_1: 31.6,34.1 32.5,35.7
  rectangle net NetC4_1: 32.4,29.5 33.4,33.3
  text "PD" at 25.166,72.7 h2
  text "AB" at 59.566,72.7 h2

## Silkscreen, mask and mechanical layers (free items; w line width, h text height)
Top Overlay:
  lines w0.256: 21,76 23,76 22,76 ; 22,75 22,77 ; 58,76 60,76 ; 20,75 21,74 62,74 62,78 21,78 20,77 20,75
Bottom Overlay:
  drawing of 21 lines, arcs and shapes, not listed
  text "AGH Space Systems" at 52.496,73.562 h1.52
  text "EPS Q2 2023" at 47.246,70.004 h1.52
Outline:
  circle w0.013: c76.006,4.006 r1.6
  circle w0.013: c4.006,76.006 r1.6
  circle w0.013: c76.006,76.006 r1.6
  circle w0.013: c4.006,4.006 r1.6
  lines w0.013: 30,0.006 2.006,0.006 cw(c2.006,2.006) 0.006,2.006 0.006,78.006 cw(c2.006,78.006) 2.006,80.006 78.006,80.006 cw(c78.006,78.006) 80.006,78.006 80.006,2.006 cw(c78.006,2.006) 78.006,0.006 74.006,0.006 cw(c74.006,2.006) 72.006,2.006 72.006,4.006 ccw(c70.006,4.006) 70.006,6.006 34,6.006 ; 30.006,0.006 ccw(c30.006,2.006) 32.006,2.006 32.006,4 ; 32.006,4.006 cw(c34.006,4.006) 34.006,6.006